# Altium PCB ESP32_USB.PcbDoc (part 2 of 3)
Units mil, origin at the board's own origin, x right, y up, seen from the top; angles counter-clockwise.
Board outline 2700 x 1000 mil, 4 copper layers (L1, L2, L3, L4), stack 61.583 mil thick; 64 components, 73 nets, 299 pads, 163 vias.
Unrouted connection lines stored in the file: 1.
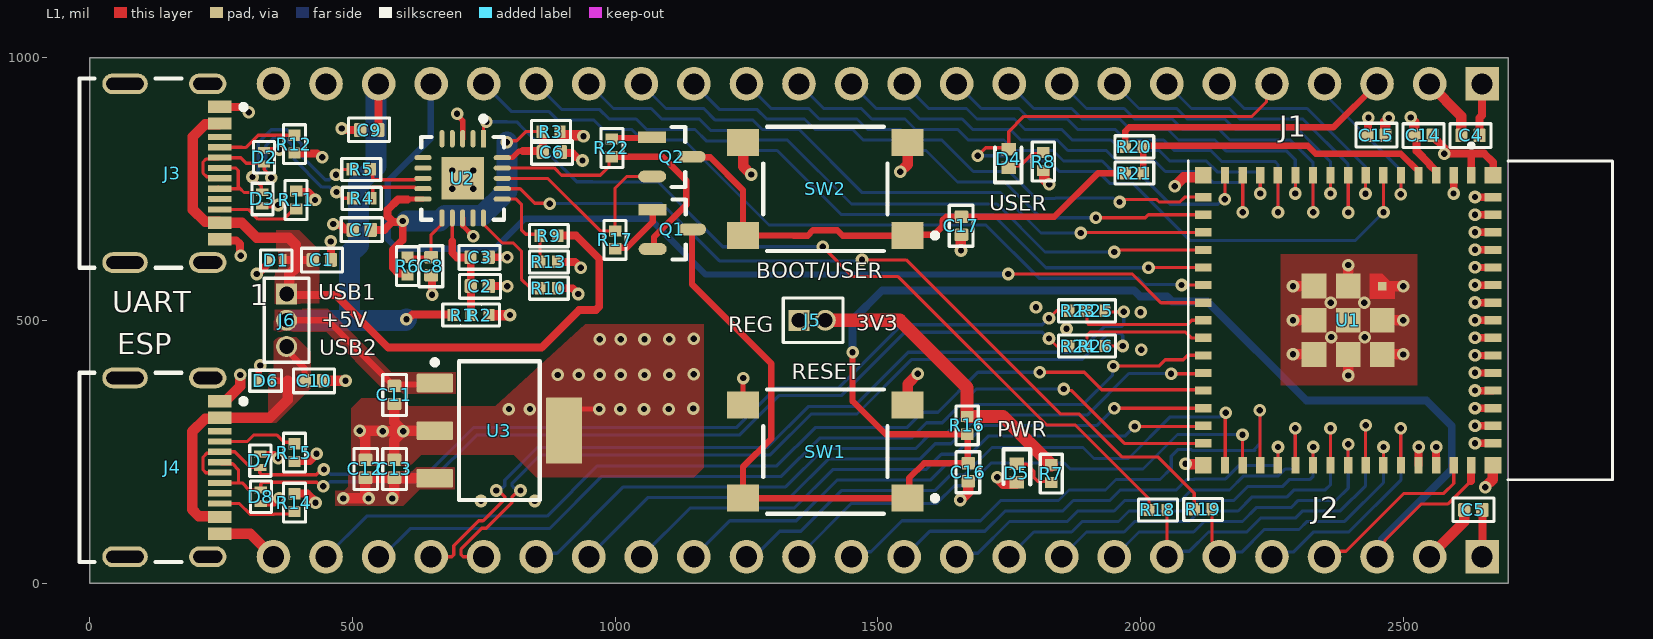
[diagram p0: L1 view]

## Part data (continued)
SW1 SW2: "Keypad Switch, 1 Switches, SPST, Momentary-tactile, 0.05A, 12VDC, 1.96N, 4 PCB Hole Cnt, Solder Terminal, Surface Mount-straight", Contact Current(DC)-Max=50mA, Contact DC Max Rating R Load=0.05A@12VDC, Contact Resistance=0.1mR, Contact Voltage(DC)-Max=12V, Dielectric Withstand Volts=250VACV, Insulation Resistance=100GR, LCSC Part No=C221869, Manufacturer="ITT C&K", Manufacturer Series=PTS645, Max Operating Temperature=60°C, Min Operating Temperature=-20°C, Supplier Part Number=611-PTS645SH50SMTR92, Actuator Type=Pushbutton, Body Breadth=5.9944mm, Body Height=3.4544mm, Body Length or Diameter=5.9944mm, Category="Tactile Switches", ComponentLink1Description=https://datasheet.ciiva.com:443/pdfs/VipMasterIC/IC/CKCI/CKCI-S-A0001796527/CKCI-S-A0001796842-1.pdf?src-supplier=IHS+Markit, ComponentLink1URL=https://datasheet.ciiva.com:443/pdfs/VipMasterIC/IC/CKCI/CKCI-S-A0001796527/CKCI-S-A0001796842-1.pdf?src-supplier=IHS+Markit, ComponentLink2Description=https://datasheet.ciiva.com/29903/getdatasheetpartid-773702-29903807.pdf?src-supplier=Verical, ComponentLink2URL=https://datasheet.ciiva.com/29903/getdatasheetpartid-773702-29903807.pdf?src-supplier=Verical, ComponentLink3Description=https://datasheet.ciiva.com/22637/1707731-22637356.pdf?src-supplier=Element14, ComponentLink3URL=https://datasheet.ciiva.com/22637/1707731-22637356.pdf?src-supplier=Element14, ComponentLink4Description=https://datasheet.ciiva.com/14920/pts645-14920741.pdf?src-supplier=Digikey, ComponentLink4URL=https://datasheet.ciiva.com/14920/pts645-14920741.pdf?src-supplier=Digikey, JESD-609 Code=e4, Manufacturer Part Number=PTS645SH50SMTR92LFS, Mounting Technology="Surface Mount", PCB Hole Count=4, Pricing="1=0.28, 10=0.236, 50=0.224, 100=0.205, 1000=0.192, 10000=0.18 (USD)", Reach SVHC Compliant=Yes, RoHS=Yes, RoHS Compliant=Yes, Stock=10260, Supplier=Mouser, Switch Action=MOMENTARY, Switch Function=SPST, Switch Type=Keypad, Terminal Finish=Silver, Terminal Length=0.138inch, Termination=Solder
U1: "SMD module, ESP32-S3FN8, 8 MB SPI flash, PCB antenna", LCSC Part No=C2913206, Manufacturer="Espressif Systems", Supplier Part Number=356-ESP32-S3-MINI1N8, Category=LDO, ComponentLink1Description=https://datasheet.octopart.com/ESP32-S3-MINI-1-N8-Espressif-Systems-datasheet-188867343.pdf?src-supplier=TME, ComponentLink1URL=https://datasheet.octopart.com/ESP32-S3-MINI-1-N8-Espressif-Systems-datasheet-188867343.pdf?src-supplier=TME, Manufacturer Part Number=ESP32-S3-MINI-1-N8, Pricing="1=6.15, 10=5.5, 25=4.31, 50=4.31, 100=4.19, 250=4.06, 650=3.65, 1000=3.65, 1300=3.44, 10000=3.44 (USD)", RoHS=No, Stock=9558, Supplier=Mouser
U2: "Microprocessor Circuit, CMOS", Case/Package=HVQCCN, LCSC Part No=C132159, Manufacturer=FTDI, Max Operating Temperature=85°C, Max Supply Current=8.4mA, Max Supply Voltage=5.5V, Min Operating Temperature=-40°C, Min Supply Voltage=2.97V, Nominal Supply Voltage=5V, Package Shape=Square, Package Style="CHIP CARRIER, HEAT SINK/SLUG, VERY THIN PROFILEMeter", Power Supplies=3.3/5V, Supplier Part Number=895-FT231XQ-R, Temperature Grade=INDUSTRIAL, Category="Interface ICs", ComponentLink1Description=https://datasheet.ciiva.com:443/pdfs/VipMasterIC/IC/FTDI/FTDIS00099/FTDIS00099-1.pdf?src-supplier=IHS+Markit, ComponentLink1URL=https://datasheet.ciiva.com:443/pdfs/VipMasterIC/IC/FTDI/FTDIS00099/FTDIS00099-1.pdf?src-supplier=IHS+Markit, ComponentLink2Description=https://datasheet.ciiva.com/1787/ds-ft231x-1787312.pdf?src-supplier=Digikey, ComponentLink2URL=https://datasheet.ciiva.com/1787/ds-ft231x-1787312.pdf?src-supplier=Digikey, ComponentLink3Description=https://datasheet.ciiva.com/30475/0900766b811020d3-30475405.pdf?src-supplier=Rs, ComponentLink3URL=https://datasheet.ciiva.com/30475/0900766b811020d3-30475405.pdf?src-supplier=Rs, ComponentLink4Description=https://datasheet.ciiva.com/4787/ds-ft231x-13571-4787570.pdf?src-supplier=Mouser, ComponentLink4URL=https://datasheet.ciiva.com/4787/ds-ft231x-13571-4787570.pdf?src-supplier=Mouser, ComponentLink5Description=https://datasheet.ciiva.com/1787/ft-x-series-1787313.pdf?src-supplier=Digikey, ComponentLink5URL=https://datasheet.ciiva.com/1787/ft-x-series-1787313.pdf?src-supplier=Digikey, ComponentLink6Description=https://datasheet.ciiva.com/1787/ft-x-series-1787314.pdf?src-supplier=Digikey, ComponentLink6URL=https://datasheet.ciiva.com/1787/ft-x-series-1787314.pdf?src-supplier=Digikey, Height - Seated (Max)=0.8mm, JESD-30 Code=S-XQCC-N20, Length=4mm, Manufacturer Part Number=FT231XQ-R, Pins=20, Pricing="1=2.34, 10=2.34, 50=2.26, 100=2.17, 1000=1.77, 10000=1.72 (USD)", Qualification Status="Not Qualified", Reach SVHC Compliant=Yes, RoHS=Yes, RoHS Compliant=Yes, Stock=69272, Supplier=Mouser, Surface Mount=Yes, Technology=CMOS, Terminal Form="No Lead", Terminal Pitch=0.5mm, Terminal Position=QUAD, Width=4mm
U3: "Fixed Positive LDO Regulator, 3.3V, 0.55V Dropout, BIPolar, PDSO4", Case/Package=SOP, Dropout Voltage1-Max=550mV, Dropout Voltage1-Nom=340mV, Input Voltage Absolute-Max=20V, LCSC Part No=C181262, Manufacturer="Texas Instruments", Min Input Voltage=3.8V, Operating Temperature, TJ-Max=125°C, Operating Temperature, TJ-Min=-40°C, Output Current1-Max=1.5A, Output Voltage1-Max=3.4V, Output Voltage1-Min=3.2V, Output Voltage1-Nom=3.3V, Package Body Material=Plastic, Package Shape=Rectangular, Peak Reflow Temperature (Cel)=260°C, Supplier Part Number=595-TL1963A-33DCYR, Voltage Tolerance-Max=3%, Adjustability=FIXED, Category="Voltage Regulators - Linear", Channels=1, ComponentLink1Description=https://www.ti.com:443/lit/ds/symlink/tl1963a.pdf?src-supplier=IHS+Markit, ComponentLink1URL=https://www.ti.com:443/lit/ds/symlink/tl1963a.pdf?src-supplier=IHS+Markit, ComponentLink2Description=https://datasheet.ciiva.com/2046/-2046068.pdf?src-supplier=Digikey, ComponentLink2URL=https://datasheet.ciiva.com/2046/-2046068.pdf?src-supplier=Digikey, Height - Seated (Max)=1.8mm, JESD-30 Code=R-PDSO-G4, JESD-609 Code=e3, Length=6.5mm, Manufacturer Part Number=TL1963A-33DCYR, Max Supply Voltage=20V, Moisture Sensitivity Level=2, Number of Outputs=1, Packaging="Tape and Reel", Pins=4, Pricing="1=2.76, 10=2.06, 50=1.89, 100=1.7, 1000=1.49, 10000=1.42 (USD)", Qualification Status="Not Qualified", Reach SVHC Compliant=Yes, Regulator Type="FIXED POSITIVE SINGLE OUTPUT LDO REGULATOR", RoHS=Yes, RoHS Compliant=Yes, Stock=4810, Supplier=Mouser, Surface Mount=Yes, Technology=BIPOLAR, Terminal Finish=Tin, Terminal Form="Gull Wing", Terminal Pitch=2.3mm, Terminal Position=DUAL, Width=3.5mm

## Via types
v1: diameter 24, hole 12, L1 to L4, tented both sides, 163 vias

## Nets (pads, with @x,y where several pads share a name; then routed paths per layer and width w, separated by ;. In a path a pad name is that pad's centre, name@x,y a point inside that pad or via, vN(x,y) a via of type N, cw(c..) or ccw(c..) an arc to the next point about the centre after c; other vN are vias at no path point)
+3.3V_REG: C12.2 C13.2 J5.1 U3.3 | length 1321
  L1 w20: v1(483,161) v1(531,161) 531,162.08 525,168.08 C12.2@525,200 C13.2@580,200 ; v1(576,161) 576,162.08 580,166.08 C13.2@580,200 ; U3.3@656.97,199.45 656.69,199.72 580.28,199.72 C13.2@580,200
  L2 w40: v1(483,161) v1(531,161) v1(576,161) 624,161 670,207 ; 1299,459 1340,500 J5.1@1350,500
  L2 w60: 670,207 742,279 1206.54,279 1296,368.46 1296,456 1299,459
+3V3: C4.2 C5.2 C14.2 C15.2 J1.2 J2.1 J5.2 R2.1 R3.1 R7.2 R8.2 R16.1 U1.3 | length 4494.2
  L1 w15: C14.2@2521,852 2525.31,847.69 2525.31,821.89 2550.27,796.93 2550.27,795.56 2562.36,783.46 U1.3@2562.36,775.59 ; J2.1@2650,50 2650.41,50.41 C5.2@2650.41,139
  L1 w20: R2.1@760,510 v1(800,510) ; R3.1@896.62,851.61 937.31,851.61 938.92,850 v1(940,850) ; R8.2@1815,784.98 1816.18,784.98 1816.81,784.35 1816.81,768.48 v1(1826.26,759.02) ; C15.2@2466,852 2466,878 2472,884 v1(2472,885) ; v1(2514,886) 2514,884 2521,877 C14.2@2521,852 ; J1.2@2550,950 2550,949 2610.59,888.41 C4.2@2610.59,852
  L1 w25: J5.2@1400,500 1542,500 1670,372 R16.1@1670,317 1738.02,317 R7.2@1830,225.02
  L2 w15: 2499.5,837.5 2550,787 2550,709 2595,664 2595,105 J2.1@2650,50
  L2 w20: v1(2472,885) 2472.5,885.5 2513.5,885.5 v1(2514,886)
  L2 w40: v1(800,510) 840,510 869,539 869,650 819,700 819,776 899,856 927,856 ; v1(940,850) 1064,850 1198,716 1309,716 ; J5.2@1400,500 1400,562 1309,653 1309,716 ; J1.2@2550,950 2550,943.51 2514,907.51 v1(2514,886) 2514,852 2499.5,837.5 2485,823 1948,823 1884.02,759.02 v1(1826.26,759.02) 1669.02,759.02 1626,716 1309,716
+3V3_FTDI: C6.2 C7.2 R3.2 R6.1 U2.10 U2.20 | length 808.5
  L1 w6: v1(794,839) 796.68,841.68 812.68,841.68 830,859 R3.2@860.99,859 R3.2@859.21,857.22
  L1 w10.01: 605,730 605.63,730.63 U2.10@634.59,730.63 ; U2.20@785.72,809.67 804.53,809.67 817.06,822.2 825,822.2
  L1 w15: C7.2@535.2,672 561,672 576.28,687.28 ; 588.62,730 596.81,730 ; R6.1@605,586 602,589 588,589 577.01,599.99 577.01,634.01 596,653 v1(596,689) 594.28,687.28 576.28,687.28 ; 605,730 596.81,730 ; 825,822.2 860.59,822.2 C6.2@862.8,820 ; C6.2@863,818.82 R3.2@863,850 ; 576.28,687.28 576.28,688.72 567.21,697.79 567.21,710.21 587,730 596.81,730
  L4 w40: v1@603.45,689 666,689 676.17,699.17 747.17,699.17 794,746 v1(794,839)
+5V: C9.2 C11.1 J1.22 J6.2 R1.1 U3.1 | length 1217.7
  L1 w12: J6.2@375,500 453.62,500 578.62,375 C11.1@580,375 582.78,377.78 654.19,377.78 U3.1@656.97,380.55
  L1 w15: C9.2@549.2,862 549.6,862.4 549.6,949.6 J1.22@550,950 ; v1(603,502) 605.44,502 614.41,510.97 R1.1@691,510.97
  L4 w40: J6.2@375,500 495,500 ; J1.22@550,950 545.41,945.41 545.41,928.44 544.72,927.75 544.72,793.94 512,761.22 512,643.6 495,626.6 495,500 ; v1(603,502) 601,500 495,500
+5V_VBUS1: C1.2 D1.2 J3.A4B9 J3.B4A9 J6.1 R9.2 | length 1438.9
  L1 w15: D1.2@368,614 368.5,614.5 392,614.5 424.5,614.5 C1.2@425,615 ; J6.1@375,550 377,548 468.26,548 568.31,447.95 860.14,447.95 931.69,519.5 963.5,519.5 970,526 970,617 926,661 R9.2@891.01,661
  L1 w20: J3.A4B9@247.64,874.41 245.83,872.6 220.25,872.6 196.77,849.12 196.77,710.72 220.25,687.24 245.83,687.24 J3.B4A9@247.64,685.43 289.57,685.43 318,657 379,657 392,644 392,614.5 392,599.46 379.99,587.44 379.99,554.99 J6.1@375,550
+5V_VBUS2: C10.2 D6.2 J4.A4B9 J4.B4A9 J6.3 | length 591.2
  L1 w12: D6.2@347.8,385 376.82,385 C10.2@410,385 409.14,385.86 409.14,408.86 375,443 J6.3@375,450
  L1 w20: J4.B4A9@247.64,125.59 245.83,127.4 207.6,127.4 195,140 195,287.51 220.25,312.76 245.83,312.76 J4.A4B9@247.64,314.57 342.57,314.57 376.82,348.82 376.82,385
+VCC_FTDI: C2.2 C3.2 R1.2 R2.2 U2.12 | length 205.6
  L1 w6: 690.2,650 U2.12@690.2,685.56
  L1 w15: 690.2,650 690.2,628.46 698.99,619.68 C3.2@724.68,619.68 ; C3.2@725,620 725.3,619.7 725.3,565.3 C2.2@725.59,565 725.79,564.8 725.79,510.2 R1.2@725.98,510
BTN_GPIO0: C17.2 Q2.3 R21.1 SW2.1 SW2.2 | length 1002.1
  L1 w12: Q2.3@1145.42,811 1146.42,810 1181,810 1243.5,747.5 SW2.2@1243.5,661.42 1339.58,661.42 1340,661 1366.5,661 1376.5,671 1423,671 1433,661 1556.08,661 SW2.1@1556.5,661.42 1558.08,663 1607,663 1623,679 1623,689.97 1630.03,697 C17.2@1659,697 1836,697 1919,780 R21.1@1970.98,780
CHIP_PU: C16.2 J2.3 Q1.3 R16.2 SW1.1 SW1.2 U1.45 | length 3383.9
  L1 w6: J2.3@2450,50 2450,64.61 2465.21,79.83 2465.21,81.26 2534.57,150.61 2585.25,150.61 2628.92,194.28
  L1 w12: Q1.3@1146.42,673 1146.42,568.58 1297.28,417.72 1297.28,274.9 1243.5,221.12 SW1.2@1243.5,161.42 SW1.1@1556.5,161.42 1560,164.92 1560,200 1588,228 C16.2@1672,228 1671,229 1671,281.98 R16.2@1670,282.98 1515.02,282.98 1452,346 v1(1452,439)
  L1 w15: 2628.92,194.28 2628.92,224.04 U1.45@2629.29,224.41
  L4 w15: v1(1452,439) 1452,500.56 1508.34,556.9 1987.28,556.9 1998.7,545.48 2050.52,545.48 2060.08,535.92 2127.08,535.92 2316,347 2544,347 2592.11,298.89 2592.11,216.11 2459.38,83.37 2459.38,59.38 J2.3@2450,50
CON1_USB_N: D2.2 J3.A7 J3.B7 R4.1 | length 510.2
  L1 w6.23: J3.A7@247.64,770.08 230.91,770.08 228.11,772.87 223.1,772.87 215.89,780.08 215.89,801.15 221.4,806.66 244.85,806.66 J3.B7@247.64,809.45 285,809.45 ; 287.55,809.45 298,799 330.41,799 D2.2@332,797.41 332.66,796.75 332.66,786.75 332.85,786.75 336.5,783.1 ; 336.3,783.1 336.5,783.1 ; v1(346,771.41) 346,773.6 336.5,783.1 ; v1(470,744) 482,732 R4.1@501,732
  L4 w6.23: v1(346,771.41) 346,773.06 335.11,783.94 335.11,831.8 351.43,848.11 370.57,848.11 389.66,829.03 389.66,806.03 442.3,753.39 457.47,753.39 466.85,744 v1(470,744)
CON1_USB_P: D3.2 J3.A6 J3.B6 R5.1 | length 522.6
  L1 w6.23: J3.B6@244.85,753.18 J3.B6@247.64,750.39 286.61,750.39 ; J3.A6@244.85,786.97 J3.A6@247.64,789.76 278.24,789.76 283,785 283,754 286.61,750.39 ; v1(310,772.59) 323.35,759.24 ; 323.16,759.24 323.35,759.24 ; v1(469,777) 470.86,777 480.86,787 R5.1@499.98,787 ; 286.61,750.39 293.91,743.09 328.5,743.09 D3.2@329,743.59 327,745.59 327,755.59 323.35,759.24
  L4 w6.23: v1(310,772.59) 310,774.24 320.89,785.13 320.89,837.7 345.53,862.34 376.47,862.34 403.89,834.93 403.89,811.93 448.2,767.61 456.47,767.61 465.85,777 v1(469,777)